# EAGLE board 14074-LuMini_2Inch-panel (EAGLE 9.0.1), part 1 of 3
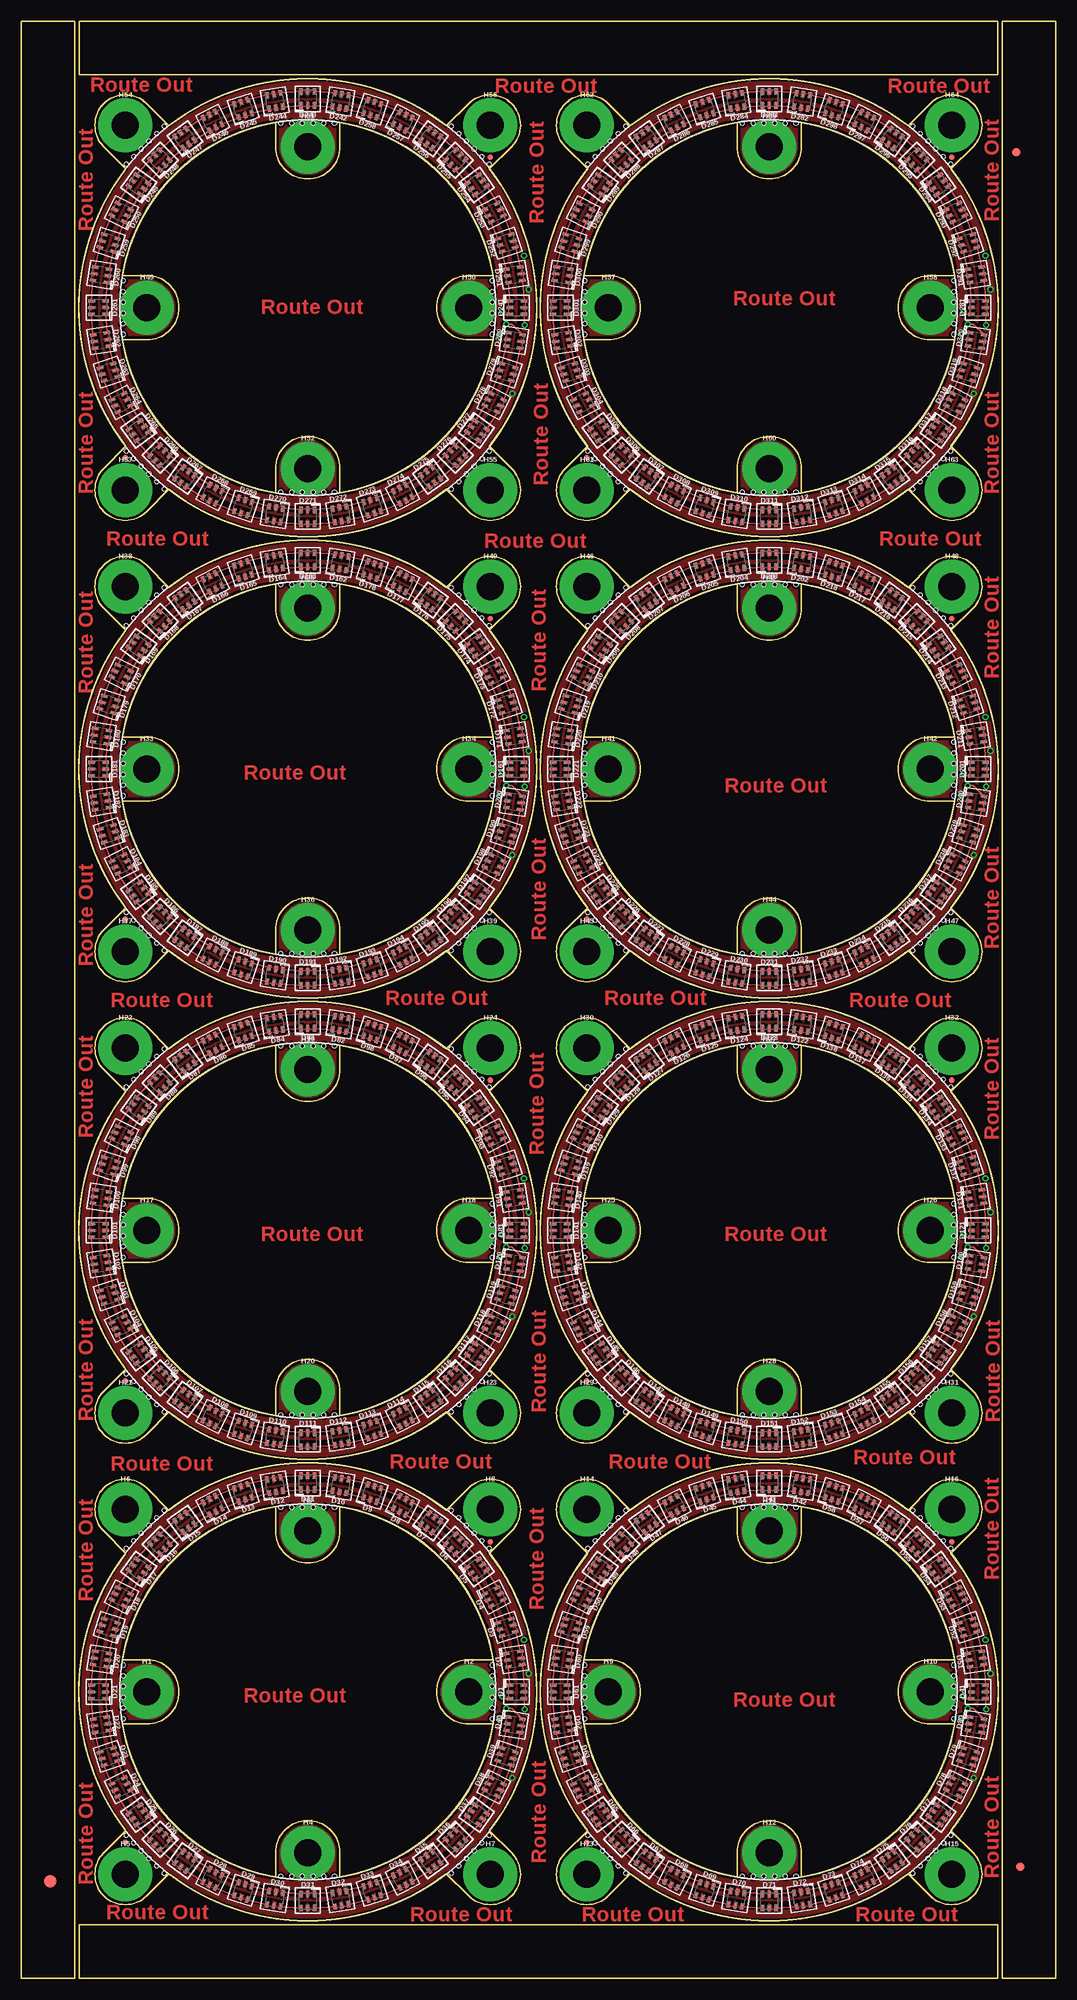
[diagram p0: board, top side]
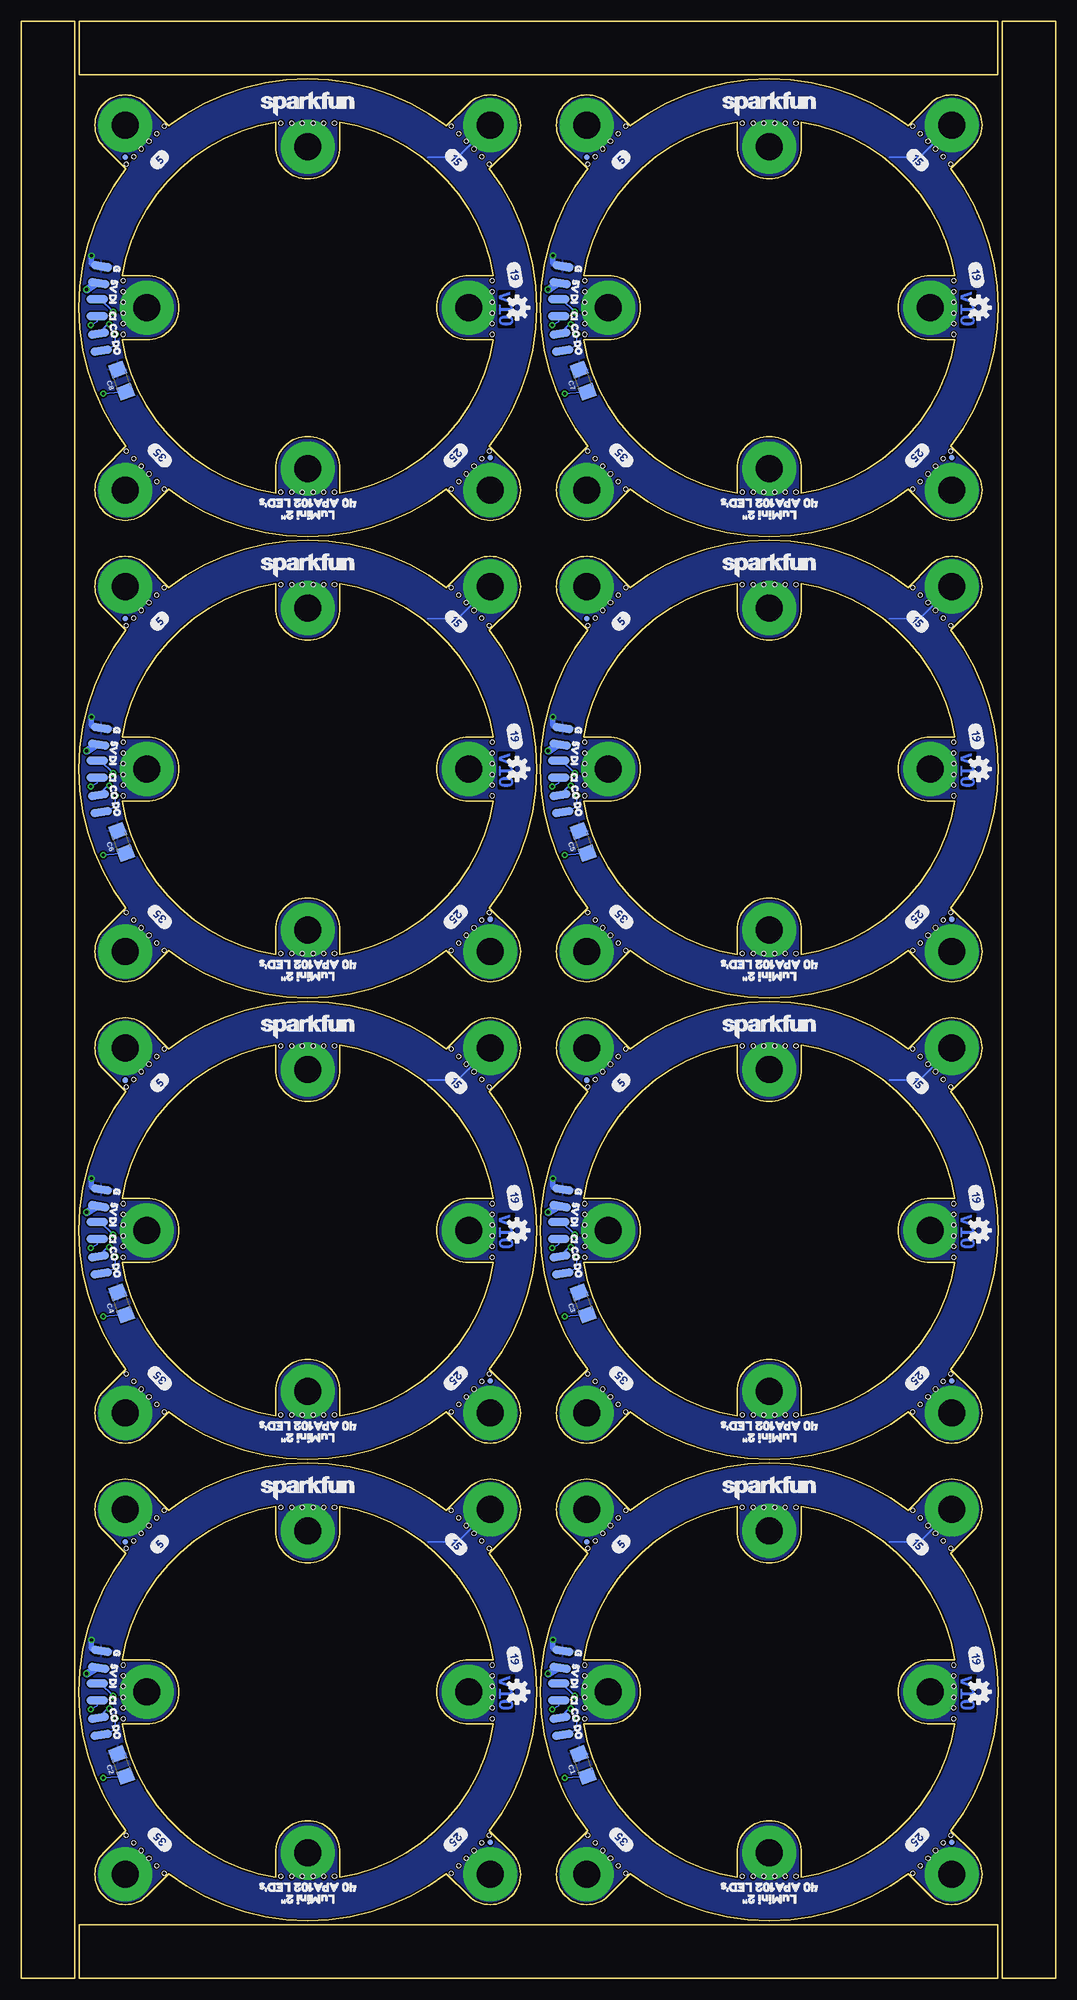
[diagram p1: board, bottom side, seen from below]

Size 122.43 x 231.65 mm. Coordinates in mm from the lower left corner, seen from the top.
Outline: 310 segments
Copper layers (1*16): Top 0.035mm / dielectric 1.5mm / Bottom 0.035mm
Design rules "SparkFun-2-layer-TIGHT": minimum track width 7mil, minimum drill 15mil, track to track 7mil, track to pad 7mil, pad to pad 7mil, via to via 7mil, smd to smd 7mil, copper to edge 7mil, drill to drill 7mil, minimum pad ring 7mil, minimum via ring 7mil, stop-mask expansion 4mil, vias tented up to drill 25mil, thermal gap 10mil
Holes 0.51 mm at 55.75,33.27 55.75,32 55.75,30.73 55.75,34.54 55.75,35.81 55.75,37.08 34.54,55.75 35.81,55.75 37.08,55.75 33.27,55.75 32,55.75 30.73,55.75 12.07,34.54 12.07,35.81 12.07,37.08 12.07,33.27 12.07,32 12.07,30.73 33.27,12.07 32,12.07 30.73,12.07 34.54,12.07 35.81,12.07 37.08,12.07 14.23,15.13 13.33,16.03 12.43,16.92 15.13,14.23 16.03,13.33 16.92,12.43 52.69,14.23 51.79,13.33 50.89,12.43 53.59,15.13 54.49,16.03 55.38,16.92 53.59,52.69 54.49,51.79 55.38,50.89 52.69,53.59 51.79,54.49 50.89,55.38 15.13,53.59 16.03,54.49 16.92,55.38 14.23,52.69 13.33,51.79 12.43,50.89 110.36,33.27 110.36,32 110.36,30.73 110.36,34.54 110.36,35.81 110.36,37.08 89.15,55.75 90.42,55.75 91.69,55.75 87.88,55.75 86.61,55.75 85.34,55.75 66.67,34.54 66.67,35.81 66.67,37.08 66.67,33.27 66.67,32 66.67,30.73 87.88,12.07 86.61,12.07 85.34,12.07 89.15,12.07 90.42,12.07 91.69,12.07 68.84,15.13 67.94,16.03 67.04,16.92 69.74,14.23 70.64,13.33 71.53,12.43 107.3,14.23 106.4,13.33 105.5,12.43 108.2,15.13 109.1,16.03 109.99,16.92 108.2,52.69 109.1,51.79 109.99,50.89 107.3,53.59 106.4,54.49 105.5,55.38 69.74,53.59 70.64,54.49 71.53,55.38 68.84,52.69 67.94,51.79 67.04,50.89 55.75,87.88 55.75,86.61 55.75,85.34 55.75,89.15 55.75,90.42 55.75,91.69 34.54,110.36 35.81,110.36 37.08,110.36 33.27,110.36 32,110.36 30.73,110.36 12.07,89.15 12.07,90.42 12.07,91.69 12.07,87.88 12.07,86.61 12.07,85.34 33.27,66.67 32,66.67 30.73,66.67 34.54,66.67 35.81,66.67 37.08,66.67 14.23,69.74 13.33,70.64 12.43,71.53 15.13,68.84 16.03,67.94 16.92,67.04 52.69,68.84 51.79,67.94 50.89,67.04 53.59,69.74 54.49,70.64 55.38,71.53 53.59,107.3 54.49,106.4 55.38,105.5 52.69,108.2 51.79,109.1 50.89,109.99 15.13,108.2 16.03,109.1 16.92,109.99 14.23,107.3 13.33,106.4 12.43,105.5 110.36,87.88 110.36,86.61 110.36,85.34 110.36,89.15 110.36,90.42 110.36,91.69 89.15,110.36 90.42,110.36 91.69,110.36 87.88,110.36 86.61,110.36 85.34,110.36 66.67,89.15 66.67,90.42 66.67,91.69 66.67,87.88 66.67,86.61 66.67,85.34 87.88,66.67 86.61,66.67 85.34,66.67 89.15,66.67 90.42,66.67 91.69,66.67 68.84,69.74 67.94,70.64 67.04,71.53 69.74,68.84 70.64,67.94 71.53,67.04 107.3,68.84 106.4,67.94 105.5,67.04 108.2,69.74 109.1,70.64 109.99,71.53 108.2,107.3 109.1,106.4 109.99,105.5 107.3,108.2 106.4,109.1 105.5,109.99 69.74,108.2 70.64,109.1 71.53,109.99 68.84,107.3 67.94,106.4 67.04,105.5 55.75,142.49 55.75,141.22 55.75,139.95 55.75,143.76 55.75,145.03 55.75,146.3 34.54,164.97 35.81,164.97 37.08,164.97 33.27,164.97 32,164.97 30.73,164.97 12.07,143.76 12.07,145.03 12.07,146.3 12.07,142.49 12.07,141.22 12.07,139.95 33.27,121.28 32,121.28 30.73,121.28 34.54,121.28 35.81,121.28 37.08,121.28 14.23,124.35 13.33,125.25 12.43,126.14 15.13,123.45 16.03,122.55 16.92,121.65 52.69,123.45 51.79,122.55 50.89,121.65 53.59,124.35 54.49,125.25 55.38,126.14 53.59,161.91 54.49,161.01 55.38,160.11 52.69,162.81 51.79,163.71 50.89,164.6 15.13,162.81 16.03,163.71 16.92,164.6 14.23,161.91 13.33,161.01 12.43,160.11 110.36,142.49 110.36,141.22 110.36,139.95 110.36,143.76 110.36,145.03 110.36,146.3 89.15,164.97 90.42,164.97 91.69,164.97 87.88,164.97 86.61,164.97 85.34,164.97 66.67,143.76 66.67,145.03 66.67,146.3 66.67,142.49 66.67,141.22 66.67,139.95 87.88,121.28 86.61,121.28 85.34,121.28 89.15,121.28 90.42,121.28 91.69,121.28 68.84,124.35 67.94,125.25 67.04,126.14 69.74,123.45 70.64,122.55 71.53,121.65 107.3,123.45 106.4,122.55 105.5,121.65 108.2,124.35 109.1,125.25 109.99,126.14 108.2,161.91 109.1,161.01 109.99,160.11 107.3,162.81 106.4,163.71 105.5,164.6 69.74,162.81 70.64,163.71 71.53,164.6 68.84,161.91 67.94,161.01 67.04,160.11 55.75,197.1 55.75,195.83 55.75,194.56 55.75,198.37 55.75,199.64 55.75,200.91 34.54,219.58 35.81,219.58 37.08,219.58 33.27,219.58 32,219.58 30.73,219.58 12.07,198.37 12.07,199.64 12.07,200.91 12.07,197.1 12.07,195.83 12.07,194.56 33.27,175.89 32,175.89 30.73,175.89 34.54,175.89 35.81,175.89 37.08,175.89 14.23,178.96 13.33,179.86 12.43,180.75 15.13,178.06 16.03,177.16 16.92,176.26 52.69,178.06 51.79,177.16 50.89,176.26 53.59,178.96 54.49,179.86 55.38,180.75 53.59,216.52 54.49,215.62 55.38,214.72 52.69,217.42 51.79,218.32 50.89,219.21 15.13,217.42 16.03,218.32 16.92,219.21 14.23,216.52 13.33,215.62 12.43,214.72 110.36,197.1 110.36,195.83 110.36,194.56 110.36,198.37 110.36,199.64 110.36,200.91 89.15,219.58 90.42,219.58 91.69,219.58 87.88,219.58 86.61,219.58 85.34,219.58 66.67,198.37 66.67,199.64 66.67,200.91 66.67,197.1 66.67,195.83 66.67,194.56 87.88,175.89 86.61,175.89 85.34,175.89 89.15,175.89 90.42,175.89 91.69,175.89 68.84,178.96 67.94,179.86 67.04,180.75 69.74,178.06 70.64,177.16 71.53,176.26 107.3,178.06 106.4,177.16 105.5,176.26 108.2,178.96 109.1,179.86 109.99,180.75 108.2,216.52 109.1,215.62 109.99,214.72 107.3,217.42 106.4,218.32 105.5,219.21 69.74,217.42 70.64,218.32 71.53,219.21 68.84,216.52 67.94,215.62 67.04,214.72

## Footprints (pad centres in the part's own frame; a part is rotated, then mirrored left to right if it is on the bottom)
1206 = smd 1.6 x 1.8: 1 -1.4,0; 2 1.4,0
APA102-2020 = smd 0.4 x 0.7: CKI -0.8,-0.85; CKO 0.8,-0.85; GND 0,0.85; SDI -0.8,0.85; SDO 0.8,0.85; VDD 0,-0.85
FIDUCIAL-1.5X3 = smd 1.5 x 1.5: 1 0,0
FIDUCIAL-1X2 = smd 1 x 1: 1 0,0
FIDUCIAL-MICRO = smd 0.635 x 0.635: 1 0,0
STANDOFF-ELECTRICAL-NOTHERMALS = drill 3.2 pad 6.35: P1 0,0
SOLDER_PAD_2 = smd 1.016 x 2.54: P$1 -1.016,0; P$2 1.016,0

## Placement (x,y rotation side)
C1  DNP  [1206]  55.93,25.26 110 bottom
C2  DNP  [1206]  110.54,25.26 110 bottom
C3  DNP  [1206]  55.93,79.87 110 bottom
C4  DNP  [1206]  110.54,79.87 110 bottom
C5  DNP  [1206]  55.93,134.48 110 bottom
C6  DNP  [1206]  110.54,134.48 110 bottom
C7  DNP  [1206]  55.93,189.09 110 bottom
C8  DNP  [1206]  110.54,189.09 110 bottom
D1  APA102-2020  [APA102-2020]  58.67,33.91 90 top
D2  APA102-2020  [APA102-2020]  58.37,37.8 99 top
D3  APA102-2020  [APA102-2020]  57.45,41.55 108 top
D4  APA102-2020  [APA102-2020]  55.98,45.16 117 top
D5  APA102-2020  [APA102-2020]  53.95,48.46 126 top
D6  APA102-2020  [APA102-2020]  51.41,51.41 135 top
D7  APA102-2020  [APA102-2020]  48.46,53.95 144 top
D8  APA102-2020  [APA102-2020]  45.16,55.98 153 top
D9  APA102-2020  [APA102-2020]  41.55,57.45 162 top
D10  APA102-2020  [APA102-2020]  37.8,58.37 171 top
D11  APA102-2020  [APA102-2020]  33.91,58.67 180 top
D12  APA102-2020  [APA102-2020]  30.02,58.37 189 top
D13  APA102-2020  [APA102-2020]  26.26,57.45 198 top
D14  APA102-2020  [APA102-2020]  22.66,55.98 207 top
D15  APA102-2020  [APA102-2020]  19.35,53.95 216 top
D16  APA102-2020  [APA102-2020]  16.41,51.41 225 top
D17  APA102-2020  [APA102-2020]  13.87,48.46 234 top
D18  APA102-2020  [APA102-2020]  11.84,45.16 243 top
D19  APA102-2020  [APA102-2020]  10.36,41.55 252 top
D20  APA102-2020  [APA102-2020]  9.45,37.8 261 top
D21  APA102-2020  [APA102-2020]  9.14,33.91 270 top
D22  APA102-2020  [APA102-2020]  9.45,30.02 279 top
D23  APA102-2020  [APA102-2020]  10.36,26.26 288 top
D24  APA102-2020  [APA102-2020]  11.84,22.66 297 top
D25  APA102-2020  [APA102-2020]  13.87,19.35 306 top
D26  APA102-2020  [APA102-2020]  16.41,16.41 315 top
D27  APA102-2020  [APA102-2020]  19.35,13.87 324 top
D28  APA102-2020  [APA102-2020]  22.66,11.84 333 top
D29  APA102-2020  [APA102-2020]  26.26,10.36 342 top
D30  APA102-2020  [APA102-2020]  30.02,9.45 351 top
D31  APA102-2020  [APA102-2020]  33.91,9.14 0 top
D32  APA102-2020  [APA102-2020]  37.8,9.45 9 top
D33  APA102-2020  [APA102-2020]  41.55,10.36 18 top
D34  APA102-2020  [APA102-2020]  45.16,11.84 27 top
D35  APA102-2020  [APA102-2020]  48.46,13.87 36 top
D36  APA102-2020  [APA102-2020]  51.41,16.41 45 top
D37  APA102-2020  [APA102-2020]  53.95,19.35 54 top
D38  APA102-2020  [APA102-2020]  55.98,22.66 63 top
D39  APA102-2020  [APA102-2020]  57.45,26.26 72 top
D40  APA102-2020  [APA102-2020]  58.37,30.02 81 top
D41  APA102-2020  [APA102-2020]  113.28,33.91 90 top
D42  APA102-2020  [APA102-2020]  92.41,58.37 171 top
D43  APA102-2020  [APA102-2020]  88.52,58.67 180 top
D44  APA102-2020  [APA102-2020]  84.63,58.37 189 top
D45  APA102-2020  [APA102-2020]  80.87,57.45 198 top
D46  APA102-2020  [APA102-2020]  77.27,55.98 207 top
D47  APA102-2020  [APA102-2020]  73.96,53.95 216 top
D48  APA102-2020  [APA102-2020]  71.02,51.41 225 top
D49  APA102-2020  [APA102-2020]  68.48,48.46 234 top
D50  APA102-2020  [APA102-2020]  66.45,45.16 243 top
D51  APA102-2020  [APA102-2020]  112.98,37.8 99 top
D52  APA102-2020  [APA102-2020]  112.06,41.55 108 top
D53  APA102-2020  [APA102-2020]  110.59,45.16 117 top
D54  APA102-2020  [APA102-2020]  108.56,48.46 126 top
D55  APA102-2020  [APA102-2020]  106.02,51.41 135 top
D56  APA102-2020  [APA102-2020]  103.07,53.95 144 top
D57  APA102-2020  [APA102-2020]  99.77,55.98 153 top
D58  APA102-2020  [APA102-2020]  96.16,57.45 162 top
D59  APA102-2020  [APA102-2020]  64.97,41.55 252 top
D60  APA102-2020  [APA102-2020]  64.06,37.8 261 top
D61  APA102-2020  [APA102-2020]  63.75,33.91 270 top
D62  APA102-2020  [APA102-2020]  64.06,30.02 279 top
D63  APA102-2020  [APA102-2020]  64.97,26.26 288 top
D64  APA102-2020  [APA102-2020]  66.45,22.66 297 top
D65  APA102-2020  [APA102-2020]  68.48,19.35 306 top
D66  APA102-2020  [APA102-2020]  71.02,16.41 315 top
D67  APA102-2020  [APA102-2020]  73.96,13.87 324 top
D68  APA102-2020  [APA102-2020]  77.27,11.84 333 top
D69  APA102-2020  [APA102-2020]  80.87,10.36 342 top
D70  APA102-2020  [APA102-2020]  84.63,9.45 351 top
D71  APA102-2020  [APA102-2020]  88.52,9.14 0 top
D72  APA102-2020  [APA102-2020]  92.41,9.45 9 top
D73  APA102-2020  [APA102-2020]  96.16,10.36 18 top
D74  APA102-2020  [APA102-2020]  99.77,11.84 27 top
D75  APA102-2020  [APA102-2020]  103.07,13.87 36 top
D76  APA102-2020  [APA102-2020]  106.02,16.41 45 top
D77  APA102-2020  [APA102-2020]  108.56,19.35 54 top
D78  APA102-2020  [APA102-2020]  110.59,22.66 63 top
D79  APA102-2020  [APA102-2020]  112.06,26.26 72 top
D80  APA102-2020  [APA102-2020]  112.98,30.02 81 top
D81  APA102-2020  [APA102-2020]  58.67,88.52 90 top
D82  APA102-2020  [APA102-2020]  37.8,112.98 171 top
D83  APA102-2020  [APA102-2020]  33.91,113.28 180 top
D84  APA102-2020  [APA102-2020]  30.02,112.98 189 top
D85  APA102-2020  [APA102-2020]  26.26,112.06 198 top
D86  APA102-2020  [APA102-2020]  22.66,110.59 207 top
D87  APA102-2020  [APA102-2020]  19.35,108.56 216 top
D88  APA102-2020  [APA102-2020]  16.41,106.02 225 top
D89  APA102-2020  [APA102-2020]  13.87,103.07 234 top
D90  APA102-2020  [APA102-2020]  11.84,99.77 243 top
D91  APA102-2020  [APA102-2020]  58.37,92.41 99 top
D92  APA102-2020  [APA102-2020]  57.45,96.16 108 top
D93  APA102-2020  [APA102-2020]  55.98,99.77 117 top
D94  APA102-2020  [APA102-2020]  53.95,103.07 126 top
D95  APA102-2020  [APA102-2020]  51.41,106.02 135 top
D96  APA102-2020  [APA102-2020]  48.46,108.56 144 top
D97  APA102-2020  [APA102-2020]  45.16,110.59 153 top
D98  APA102-2020  [APA102-2020]  41.55,112.06 162 top
D99  APA102-2020  [APA102-2020]  10.36,96.16 252 top
D100  APA102-2020  [APA102-2020]  9.45,92.41 261 top
D101  APA102-2020  [APA102-2020]  9.14,88.52 270 top
D102  APA102-2020  [APA102-2020]  9.45,84.63 279 top
D103  APA102-2020  [APA102-2020]  10.36,80.87 288 top
D104  APA102-2020  [APA102-2020]  11.84,77.27 297 top
D105  APA102-2020  [APA102-2020]  13.87,73.96 306 top
D106  APA102-2020  [APA102-2020]  16.41,71.02 315 top
D107  APA102-2020  [APA102-2020]  19.35,68.48 324 top
D108  APA102-2020  [APA102-2020]  22.66,66.45 333 top
D109  APA102-2020  [APA102-2020]  26.26,64.97 342 top
D110  APA102-2020  [APA102-2020]  30.02,64.06 351 top
D111  APA102-2020  [APA102-2020]  33.91,63.75 0 top
D112  APA102-2020  [APA102-2020]  37.8,64.06 9 top
D113  APA102-2020  [APA102-2020]  41.55,64.97 18 top
D114  APA102-2020  [APA102-2020]  45.16,66.45 27 top
D115  APA102-2020  [APA102-2020]  48.46,68.48 36 top
D116  APA102-2020  [APA102-2020]  51.41,71.02 45 top
D117  APA102-2020  [APA102-2020]  53.95,73.96 54 top
D118  APA102-2020  [APA102-2020]  55.98,77.27 63 top
D119  APA102-2020  [APA102-2020]  57.45,80.87 72 top
D120  APA102-2020  [APA102-2020]  58.37,84.63 81 top
D121  APA102-2020  [APA102-2020]  113.28,88.52 90 top
D122  APA102-2020  [APA102-2020]  92.41,112.98 171 top
D123  APA102-2020  [APA102-2020]  88.52,113.28 180 top
D124  APA102-2020  [APA102-2020]  84.63,112.98 189 top
D125  APA102-2020  [APA102-2020]  80.87,112.06 198 top
D126  APA102-2020  [APA102-2020]  77.27,110.59 207 top
D127  APA102-2020  [APA102-2020]  73.96,108.56 216 top
D128  APA102-2020  [APA102-2020]  71.02,106.02 225 top
D129  APA102-2020  [APA102-2020]  68.48,103.07 234 top
D130  APA102-2020  [APA102-2020]  66.45,99.77 243 top
D131  APA102-2020  [APA102-2020]  112.98,92.41 99 top
D132  APA102-2020  [APA102-2020]  112.06,96.16 108 top
D133  APA102-2020  [APA102-2020]  110.59,99.77 117 top
D134  APA102-2020  [APA102-2020]  108.56,103.07 126 top
D135  APA102-2020  [APA102-2020]  106.02,106.02 135 top
D136  APA102-2020  [APA102-2020]  103.07,108.56 144 top
D137  APA102-2020  [APA102-2020]  99.77,110.59 153 top
D138  APA102-2020  [APA102-2020]  96.16,112.06 162 top
D139  APA102-2020  [APA102-2020]  64.97,96.16 252 top
D140  APA102-2020  [APA102-2020]  64.06,92.41 261 top
D141  APA102-2020  [APA102-2020]  63.75,88.52 270 top
D142  APA102-2020  [APA102-2020]  64.06,84.63 279 top
D143  APA102-2020  [APA102-2020]  64.97,80.87 288 top
D144  APA102-2020  [APA102-2020]  66.45,77.27 297 top
D145  APA102-2020  [APA102-2020]  68.48,73.96 306 top
D146  APA102-2020  [APA102-2020]  71.02,71.02 315 top
D147  APA102-2020  [APA102-2020]  73.96,68.48 324 top
D148  APA102-2020  [APA102-2020]  77.27,66.45 333 top
D149  APA102-2020  [APA102-2020]  80.87,64.97 342 top
D150  APA102-2020  [APA102-2020]  84.63,64.06 351 top
D151  APA102-2020  [APA102-2020]  88.52,63.75 0 top
D152  APA102-2020  [APA102-2020]  92.41,64.06 9 top
D153  APA102-2020  [APA102-2020]  96.16,64.97 18 top
D154  APA102-2020  [APA102-2020]  99.77,66.45 27 top
D155  APA102-2020  [APA102-2020]  103.07,68.48 36 top
D156  APA102-2020  [APA102-2020]  106.02,71.02 45 top
D157  APA102-2020  [APA102-2020]  108.56,73.96 54 top
D158  APA102-2020  [APA102-2020]  110.59,77.27 63 top
D159  APA102-2020  [APA102-2020]  112.06,80.87 72 top
D160  APA102-2020  [APA102-2020]  112.98,84.63 81 top
D161  APA102-2020  [APA102-2020]  58.67,143.13 90 top
D162  APA102-2020  [APA102-2020]  37.8,167.59 171 top
D163  APA102-2020  [APA102-2020]  33.91,167.89 180 top
D164  APA102-2020  [APA102-2020]  30.02,167.59 189 top
D165  APA102-2020  [APA102-2020]  26.26,166.67 198 top
D166  APA102-2020  [APA102-2020]  22.66,165.2 207 top
D167  APA102-2020  [APA102-2020]  19.35,163.17 216 top
D168  APA102-2020  [APA102-2020]  16.41,160.63 225 top
D169  APA102-2020  [APA102-2020]  13.87,157.68 234 top
D170  APA102-2020  [APA102-2020]  11.84,154.38 243 top
D171  APA102-2020  [APA102-2020]  58.37,147.02 99 top
D172  APA102-2020  [APA102-2020]  57.45,150.77 108 top
D173  APA102-2020  [APA102-2020]  55.98,154.38 117 top
D174  APA102-2020  [APA102-2020]  53.95,157.68 126 top
D175  APA102-2020  [APA102-2020]  51.41,160.63 135 top
D176  APA102-2020  [APA102-2020]  48.46,163.17 144 top
D177  APA102-2020  [APA102-2020]  45.16,165.2 153 top
D178  APA102-2020  [APA102-2020]  41.55,166.67 162 top
D179  APA102-2020  [APA102-2020]  10.36,150.77 252 top
D180  APA102-2020  [APA102-2020]  9.45,147.02 261 top
D181  APA102-2020  [APA102-2020]  9.14,143.13 270 top
D182  APA102-2020  [APA102-2020]  9.45,139.24 279 top
D183  APA102-2020  [APA102-2020]  10.36,135.48 288 top
D184  APA102-2020  [APA102-2020]  11.84,131.88 297 top
D185  APA102-2020  [APA102-2020]  13.87,128.57 306 top
D186  APA102-2020  [APA102-2020]  16.41,125.63 315 top
D187  APA102-2020  [APA102-2020]  19.35,123.09 324 top
D188  APA102-2020  [APA102-2020]  22.66,121.06 333 top
D189  APA102-2020  [APA102-2020]  26.26,119.58 342 top
D190  APA102-2020  [APA102-2020]  30.02,118.67 351 top
D191  APA102-2020  [APA102-2020]  33.91,118.36 0 top
D192  APA102-2020  [APA102-2020]  37.8,118.67 9 top
D193  APA102-2020  [APA102-2020]  41.55,119.58 18 top
D194  APA102-2020  [APA102-2020]  45.16,121.06 27 top
D195  APA102-2020  [APA102-2020]  48.46,123.09 36 top
D196  APA102-2020  [APA102-2020]  51.41,125.63 45 top
D197  APA102-2020  [APA102-2020]  53.95,128.57 54 top
D198  APA102-2020  [APA102-2020]  55.98,131.88 63 top
D199  APA102-2020  [APA102-2020]  57.45,135.48 72 top
D200  APA102-2020  [APA102-2020]  58.37,139.24 81 top
D201  APA102-2020  [APA102-2020]  113.28,143.13 90 top
D202  APA102-2020  [APA102-2020]  92.41,167.59 171 top
D203  APA102-2020  [APA102-2020]  88.52,167.89 180 top
D204  APA102-2020  [APA102-2020]  84.63,167.59 189 top
D205  APA102-2020  [APA102-2020]  80.87,166.67 198 top
D206  APA102-2020  [APA102-2020]  77.27,165.2 207 top
D207  APA102-2020  [APA102-2020]  73.96,163.17 216 top
D208  APA102-2020  [APA102-2020]  71.02,160.63 225 top
D209  APA102-2020  [APA102-2020]  68.48,157.68 234 top
D210  APA102-2020  [APA102-2020]  66.45,154.38 243 top
D211  APA102-2020  [APA102-2020]  112.98,147.02 99 top
D212  APA102-2020  [APA102-2020]  112.06,150.77 108 top
D213  APA102-2020  [APA102-2020]  110.59,154.38 117 top
D214  APA102-2020  [APA102-2020]  108.56,157.68 126 top
D215  APA102-2020  [APA102-2020]  106.02,160.63 135 top
D216  APA102-2020  [APA102-2020]  103.07,163.17 144 top
D217  APA102-2020  [APA102-2020]  99.77,165.2 153 top
D218  APA102-2020  [APA102-2020]  96.16,166.67 162 top
D219  APA102-2020  [APA102-2020]  64.97,150.77 252 top
D220  APA102-2020  [APA102-2020]  64.06,147.02 261 top
D221  APA102-2020  [APA102-2020]  63.75,143.13 270 top
D222  APA102-2020  [APA102-2020]  64.06,139.24 279 top
D223  APA102-2020  [APA102-2020]  64.97,135.48 288 top
D224  APA102-2020  [APA102-2020]  66.45,131.88 297 top
D225  APA102-2020  [APA102-2020]  68.48,128.57 306 top
D226  APA102-2020  [APA102-2020]  71.02,125.63 315 top
D227  APA102-2020  [APA102-2020]  73.96,123.09 324 top
D228  APA102-2020  [APA102-2020]  77.27,121.06 333 top
D229  APA102-2020  [APA102-2020]  80.87,119.58 342 top
D230  APA102-2020  [APA102-2020]  84.63,118.67 351 top
D231  APA102-2020  [APA102-2020]  88.52,118.36 0 top
D232  APA102-2020  [APA102-2020]  92.41,118.67 9 top
D233  APA102-2020  [APA102-2020]  96.16,119.58 18 top
D234  APA102-2020  [APA102-2020]  99.77,121.06 27 top
D235  APA102-2020  [APA102-2020]  103.07,123.09 36 top
D236  APA102-2020  [APA102-2020]  106.02,125.63 45 top
D237  APA102-2020  [APA102-2020]  108.56,128.57 54 top
D238  APA102-2020  [APA102-2020]  110.59,131.88 63 top
D239  APA102-2020  [APA102-2020]  112.06,135.48 72 top
D240  APA102-2020  [APA102-2020]  112.98,139.24 81 top
D241  APA102-2020  [APA102-2020]  58.67,197.74 90 top
D242  APA102-2020  [APA102-2020]  37.8,222.2 171 top
D243  APA102-2020  [APA102-2020]  33.91,222.5 180 top
D244  APA102-2020  [APA102-2020]  30.02,222.2 189 top
D245  APA102-2020  [APA102-2020]  26.26,221.28 198 top
D246  APA102-2020  [APA102-2020]  22.66,219.81 207 top
D247  APA102-2020  [APA102-2020]  19.35,217.78 216 top
D248  APA102-2020  [APA102-2020]  16.41,215.24 225 top
D249  APA102-2020  [APA102-2020]  13.87,212.29 234 top
D250  APA102-2020  [APA102-2020]  11.84,208.99 243 top
D251  APA102-2020  [APA102-2020]  58.37,201.63 99 top
D252  APA102-2020  [APA102-2020]  57.45,205.38 108 top
D253  APA102-2020  [APA102-2020]  55.98,208.99 117 top
D254  APA102-2020  [APA102-2020]  53.95,212.29 126 top
D255  APA102-2020  [APA102-2020]  51.41,215.24 135 top
D256  APA102-2020  [APA102-2020]  48.46,217.78 144 top
D257  APA102-2020  [APA102-2020]  45.16,219.81 153 top
D258  APA102-2020  [APA102-2020]  41.55,221.28 162 top
D259  APA102-2020  [APA102-2020]  10.36,205.38 252 top
D260  APA102-2020  [APA102-2020]  9.45,201.63 261 top
D261  APA102-2020  [APA102-2020]  9.14,197.74 270 top
D262  APA102-2020  [APA102-2020]  9.45,193.85 279 top
D263  APA102-2020  [APA102-2020]  10.36,190.09 288 top
D264  APA102-2020  [APA102-2020]  11.84,186.49 297 top
D265  APA102-2020  [APA102-2020]  13.87,183.18 306 top
D266  APA102-2020  [APA102-2020]  16.41,180.24 315 top
D267  APA102-2020  [APA102-2020]  19.35,177.7 324 top
D268  APA102-2020  [APA102-2020]  22.66,175.67 333 top
D269  APA102-2020  [APA102-2020]  26.26,174.19 342 top
D270  APA102-2020  [APA102-2020]  30.02,173.28 351 top
D271  APA102-2020  [APA102-2020]  33.91,172.97 0 top
D272  APA102-2020  [APA102-2020]  37.8,173.28 9 top
D273  APA102-2020  [APA102-2020]  41.55,174.19 18 top
D274  APA102-2020  [APA102-2020]  45.16,175.67 27 top
D275  APA102-2020  [APA102-2020]  48.46,177.7 36 top
D276  APA102-2020  [APA102-2020]  51.41,180.24 45 top
D277  APA102-2020  [APA102-2020]  53.95,183.18 54 top
D278  APA102-2020  [APA102-2020]  55.98,186.49 63 top
D279  APA102-2020  [APA102-2020]  57.45,190.09 72 top
D280  APA102-2020  [APA102-2020]  58.37,193.85 81 top
D281  APA102-2020  [APA102-2020]  113.28,197.74 90 top
D282  APA102-2020  [APA102-2020]  92.41,222.2 171 top
D283  APA102-2020  [APA102-2020]  88.52,222.5 180 top
D284  APA102-2020  [APA102-2020]  84.63,222.2 189 top
D285  APA102-2020  [APA102-2020]  80.87,221.28 198 top
D286  APA102-2020  [APA102-2020]  77.27,219.81 207 top
D287  APA102-2020  [APA102-2020]  73.96,217.78 216 top
D288  APA102-2020  [APA102-2020]  71.02,215.24 225 top
D289  APA102-2020  [APA102-2020]  68.48,212.29 234 top
D290  APA102-2020  [APA102-2020]  66.45,208.99 243 top
D291  APA102-2020  [APA102-2020]  112.98,201.63 99 top
D292  APA102-2020  [APA102-2020]  112.06,205.38 108 top
D293  APA102-2020  [APA102-2020]  110.59,208.99 117 top
D294  APA102-2020  [APA102-2020]  108.56,212.29 126 top
D295  APA102-2020  [APA102-2020]  106.02,215.24 135 top
D296  APA102-2020  [APA102-2020]  103.07,217.78 144 top
D297  APA102-2020  [APA102-2020]  99.77,219.81 153 top
D298  APA102-2020  [APA102-2020]  96.16,221.28 162 top
D299  APA102-2020  [APA102-2020]  64.97,205.38 252 top
D300  APA102-2020  [APA102-2020]  64.06,201.63 261 top
D301  APA102-2020  [APA102-2020]  63.75,197.74 270 top
D302  APA102-2020  [APA102-2020]  64.06,193.85 279 top
D303  APA102-2020  [APA102-2020]  64.97,190.09 288 top
D304  APA102-2020  [APA102-2020]  66.45,186.49 297 top
D305  APA102-2020  [APA102-2020]  68.48,183.18 306 top
D306  APA102-2020  [APA102-2020]  71.02,180.24 315 top
D307  APA102-2020  [APA102-2020]  73.96,177.7 324 top
D308  APA102-2020  [APA102-2020]  77.27,175.67 333 top
D309  APA102-2020  [APA102-2020]  80.87,174.19 342 top
D310  APA102-2020  [APA102-2020]  84.63,173.28 351 top
D311  APA102-2020  [APA102-2020]  88.52,172.97 0 top
D312  APA102-2020  [APA102-2020]  92.41,173.28 9 top
D313  APA102-2020  [APA102-2020]  96.16,174.19 18 top
D314  APA102-2020  [APA102-2020]  99.77,175.67 27 top
D315  APA102-2020  [APA102-2020]  103.07,177.7 36 top
D316  APA102-2020  [APA102-2020]  106.02,180.24 45 top
D317  APA102-2020  [APA102-2020]  108.56,183.18 54 top
D318  APA102-2020  [APA102-2020]  110.59,186.49 63 top
D319  APA102-2020  [APA102-2020]  112.06,190.09 72 top
D320  APA102-2020  [APA102-2020]  112.98,193.85 81 top
E$1  [FIDUCIAL-1.5X3]  3.43,11.49 0 top
E$5  [FIDUCIAL-1X2]  117.73,216.15 180 top
E$6  [FIDUCIAL-1X2]  118.24,13.21 0 top
FD1  FIDUCIALUFIDUCIAL  [FIDUCIAL-MICRO]  12.32,16.13 0 top
FD2  FIDUCIALUFIDUCIAL  [FIDUCIAL-MICRO]  12.32,16.13 0 bottom
FD3  FIDUCIALUFIDUCIAL  [FIDUCIAL-MICRO]  55.5,51.69 0 top
FD4  FIDUCIALUFIDUCIAL  [FIDUCIAL-MICRO]  55.5,51.69 0 bottom
FD5  FIDUCIALUFIDUCIAL  [FIDUCIAL-MICRO]  66.93,16.13 0 top
FD6  FIDUCIALUFIDUCIAL  [FIDUCIAL-MICRO]  66.93,16.13 0 bottom
FD7  FIDUCIALUFIDUCIAL  [FIDUCIAL-MICRO]  110.11,51.69 0 top
FD8  FIDUCIALUFIDUCIAL  [FIDUCIAL-MICRO]  110.11,51.69 0 bottom
FD9  FIDUCIALUFIDUCIAL  [FIDUCIAL-MICRO]  12.32,70.74 0 top
FD10  FIDUCIALUFIDUCIAL  [FIDUCIAL-MICRO]  12.32,70.74 0 bottom
FD11  FIDUCIALUFIDUCIAL  [FIDUCIAL-MICRO]  55.5,106.3 0 top
FD12  FIDUCIALUFIDUCIAL  [FIDUCIAL-MICRO]  55.5,106.3 0 bottom
FD13  FIDUCIALUFIDUCIAL  [FIDUCIAL-MICRO]  66.93,70.74 0 top
FD14  FIDUCIALUFIDUCIAL  [FIDUCIAL-MICRO]  66.93,70.74 0 bottom
FD15  FIDUCIALUFIDUCIAL  [FIDUCIAL-MICRO]  110.11,106.3 0 top
FD16  FIDUCIALUFIDUCIAL  [FIDUCIAL-MICRO]  110.11,106.3 0 bottom
FD17  FIDUCIALUFIDUCIAL  [FIDUCIAL-MICRO]  12.32,125.35 0 top
FD18  FIDUCIALUFIDUCIAL  [FIDUCIAL-MICRO]  12.32,125.35 0 bottom
FD19  FIDUCIALUFIDUCIAL  [FIDUCIAL-MICRO]  55.5,160.91 0 top
FD20  FIDUCIALUFIDUCIAL  [FIDUCIAL-MICRO]  55.5,160.91 0 bottom
FD21  FIDUCIALUFIDUCIAL  [FIDUCIAL-MICRO]  66.93,125.35 0 top
FD22  FIDUCIALUFIDUCIAL  [FIDUCIAL-MICRO]  66.93,125.35 0 bottom
FD23  FIDUCIALUFIDUCIAL  [FIDUCIAL-MICRO]  110.11,160.91 0 top
FD24  FIDUCIALUFIDUCIAL  [FIDUCIAL-MICRO]  110.11,160.91 0 bottom
FD25  FIDUCIALUFIDUCIAL  [FIDUCIAL-MICRO]  12.32,179.96 0 top
FD26  FIDUCIALUFIDUCIAL  [FIDUCIAL-MICRO]  12.32,179.96 0 bottom
FD27  FIDUCIALUFIDUCIAL  [FIDUCIAL-MICRO]  55.5,215.52 0 top
FD28  FIDUCIALUFIDUCIAL  [FIDUCIAL-MICRO]  55.5,215.52 0 bottom
FD29  FIDUCIALUFIDUCIAL  [FIDUCIAL-MICRO]  66.93,179.96 0 top
FD30  FIDUCIALUFIDUCIAL  [FIDUCIAL-MICRO]  66.93,179.96 0 bottom
FD31  FIDUCIALUFIDUCIAL  [FIDUCIAL-MICRO]  110.11,215.52 0 top
FD32  FIDUCIALUFIDUCIAL  [FIDUCIAL-MICRO]  110.11,215.52 0 bottom
H1  STANDOFF_ELECTRICAL-NOTHERMALS  [STANDOFF-ELECTRICAL-NOTHERMALS]  14.86,33.91 0 top
H2  STANDOFF_ELECTRICAL-NOTHERMALS  [STANDOFF-ELECTRICAL-NOTHERMALS]  52.96,33.91 0 top
H3  STANDOFF_ELECTRICAL-NOTHERMALS  [STANDOFF-ELECTRICAL-NOTHERMALS]  33.91,52.96 0 top
H4  STANDOFF_ELECTRICAL-NOTHERMALS  [STANDOFF-ELECTRICAL-NOTHERMALS]  33.91,14.86 0 top
H5  STANDOFF_ELECTRICAL-NOTHERMALS  [STANDOFF-ELECTRICAL-NOTHERMALS]  12.32,12.32 0 top
H6  STANDOFF_ELECTRICAL-NOTHERMALS  [STANDOFF-ELECTRICAL-NOTHERMALS]  12.32,55.5 0 top
H7  STANDOFF_ELECTRICAL-NOTHERMALS  [STANDOFF-ELECTRICAL-NOTHERMALS]  55.5,12.32 0 top
H8  STANDOFF_ELECTRICAL-NOTHERMALS  [STANDOFF-ELECTRICAL-NOTHERMALS]  55.5,55.5 0 top
H9  STANDOFF_ELECTRICAL-NOTHERMALS  [STANDOFF-ELECTRICAL-NOTHERMALS]  69.47,33.91 0 top
H10  STANDOFF_ELECTRICAL-NOTHERMALS  [STANDOFF-ELECTRICAL-NOTHERMALS]  107.57,33.91 0 top
H11  STANDOFF_ELECTRICAL-NOTHERMALS  [STANDOFF-ELECTRICAL-NOTHERMALS]  88.52,52.96 0 top
H12  STANDOFF_ELECTRICAL-NOTHERMALS  [STANDOFF-ELECTRICAL-NOTHERMALS]  88.52,14.86 0 top
H13  STANDOFF_ELECTRICAL-NOTHERMALS  [STANDOFF-ELECTRICAL-NOTHERMALS]  66.93,12.32 0 top
H14  STANDOFF_ELECTRICAL-NOTHERMALS  [STANDOFF-ELECTRICAL-NOTHERMALS]  66.93,55.5 0 top
H15  STANDOFF_ELECTRICAL-NOTHERMALS  [STANDOFF-ELECTRICAL-NOTHERMALS]  110.11,12.32 0 top
H16  STANDOFF_ELECTRICAL-NOTHERMALS  [STANDOFF-ELECTRICAL-NOTHERMALS]  110.11,55.5 0 top
H17  STANDOFF_ELECTRICAL-NOTHERMALS  [STANDOFF-ELECTRICAL-NOTHERMALS]  14.86,88.52 0 top
H18  STANDOFF_ELECTRICAL-NOTHERMALS  [STANDOFF-ELECTRICAL-NOTHERMALS]  52.96,88.52 0 top
H19  STANDOFF_ELECTRICAL-NOTHERMALS  [STANDOFF-ELECTRICAL-NOTHERMALS]  33.91,107.57 0 top
H20  STANDOFF_ELECTRICAL-NOTHERMALS  [STANDOFF-ELECTRICAL-NOTHERMALS]  33.91,69.47 0 top
H21  STANDOFF_ELECTRICAL-NOTHERMALS  [STANDOFF-ELECTRICAL-NOTHERMALS]  12.32,66.93 0 top
H22  STANDOFF_ELECTRICAL-NOTHERMALS  [STANDOFF-ELECTRICAL-NOTHERMALS]  12.32,110.11 0 top
H23  STANDOFF_ELECTRICAL-NOTHERMALS  [STANDOFF-ELECTRICAL-NOTHERMALS]  55.5,66.93 0 top
H24  STANDOFF_ELECTRICAL-NOTHERMALS  [STANDOFF-ELECTRICAL-NOTHERMALS]  55.5,110.11 0 top
H25  STANDOFF_ELECTRICAL-NOTHERMALS  [STANDOFF-ELECTRICAL-NOTHERMALS]  69.47,88.52 0 top
H26  STANDOFF_ELECTRICAL-NOTHERMALS  [STANDOFF-ELECTRICAL-NOTHERMALS]  107.57,88.52 0 top
H27  STANDOFF_ELECTRICAL-NOTHERMALS  [STANDOFF-ELECTRICAL-NOTHERMALS]  88.52,107.57 0 top
H28  STANDOFF_ELECTRICAL-NOTHERMALS  [STANDOFF-ELECTRICAL-NOTHERMALS]  88.52,69.47 0 top
H29  STANDOFF_ELECTRICAL-NOTHERMALS  [STANDOFF-ELECTRICAL-NOTHERMALS]  66.93,66.93 0 top
H30  STANDOFF_ELECTRICAL-NOTHERMALS  [STANDOFF-ELECTRICAL-NOTHERMALS]  66.93,110.11 0 top
H31  STANDOFF_ELECTRICAL-NOTHERMALS  [STANDOFF-ELECTRICAL-NOTHERMALS]  110.11,66.93 0 top
H32  STANDOFF_ELECTRICAL-NOTHERMALS  [STANDOFF-ELECTRICAL-NOTHERMALS]  110.11,110.11 0 top
H33  STANDOFF_ELECTRICAL-NOTHERMALS  [STANDOFF-ELECTRICAL-NOTHERMALS]  14.86,143.13 0 top
H34  STANDOFF_ELECTRICAL-NOTHERMALS  [STANDOFF-ELECTRICAL-NOTHERMALS]  52.96,143.13 0 top
H35  STANDOFF_ELECTRICAL-NOTHERMALS  [STANDOFF-ELECTRICAL-NOTHERMALS]  33.91,162.18 0 top
H36  STANDOFF_ELECTRICAL-NOTHERMALS  [STANDOFF-ELECTRICAL-NOTHERMALS]  33.91,124.08 0 top
H37  STANDOFF_ELECTRICAL-NOTHERMALS  [STANDOFF-ELECTRICAL-NOTHERMALS]  12.32,121.54 0 top
H38  STANDOFF_ELECTRICAL-NOTHERMALS  [STANDOFF-ELECTRICAL-NOTHERMALS]  12.32,164.72 0 top
H39  STANDOFF_ELECTRICAL-NOTHERMALS  [STANDOFF-ELECTRICAL-NOTHERMALS]  55.5,121.54 0 top
H40  STANDOFF_ELECTRICAL-NOTHERMALS  [STANDOFF-ELECTRICAL-NOTHERMALS]  55.5,164.72 0 top
H41  STANDOFF_ELECTRICAL-NOTHERMALS  [STANDOFF-ELECTRICAL-NOTHERMALS]  69.47,143.13 0 top
H42  STANDOFF_ELECTRICAL-NOTHERMALS  [STANDOFF-ELECTRICAL-NOTHERMALS]  107.57,143.13 0 top
H43  STANDOFF_ELECTRICAL-NOTHERMALS  [STANDOFF-ELECTRICAL-NOTHERMALS]  88.52,162.18 0 top
H44  STANDOFF_ELECTRICAL-NOTHERMALS  [STANDOFF-ELECTRICAL-NOTHERMALS]  88.52,124.08 0 top
H45  STANDOFF_ELECTRICAL-NOTHERMALS  [STANDOFF-ELECTRICAL-NOTHERMALS]  66.93,121.54 0 top
H46  STANDOFF_ELECTRICAL-NOTHERMALS  [STANDOFF-ELECTRICAL-NOTHERMALS]  66.93,164.72 0 top
H47  STANDOFF_ELECTRICAL-NOTHERMALS  [STANDOFF-ELECTRICAL-NOTHERMALS]  110.11,121.54 0 top
H48  STANDOFF_ELECTRICAL-NOTHERMALS  [STANDOFF-ELECTRICAL-NOTHERMALS]  110.11,164.72 0 top
H49  STANDOFF_ELECTRICAL-NOTHERMALS  [STANDOFF-ELECTRICAL-NOTHERMALS]  14.86,197.74 0 top
H50  STANDOFF_ELECTRICAL-NOTHERMALS  [STANDOFF-ELECTRICAL-NOTHERMALS]  52.96,197.74 0 top
H51  STANDOFF_ELECTRICAL-NOTHERMALS  [STANDOFF-ELECTRICAL-NOTHERMALS]  33.91,216.79 0 top
H52  STANDOFF_ELECTRICAL-NOTHERMALS  [STANDOFF-ELECTRICAL-NOTHERMALS]  33.91,178.69 0 top
H53  STANDOFF_ELECTRICAL-NOTHERMALS  [STANDOFF-ELECTRICAL-NOTHERMALS]  12.32,176.15 0 top
H54  STANDOFF_ELECTRICAL-NOTHERMALS  [STANDOFF-ELECTRICAL-NOTHERMALS]  12.32,219.33 0 top
H55  STANDOFF_ELECTRICAL-NOTHERMALS  [STANDOFF-ELECTRICAL-NOTHERMALS]  55.5,176.15 0 top
H56  STANDOFF_ELECTRICAL-NOTHERMALS  [STANDOFF-ELECTRICAL-NOTHERMALS]  55.5,219.33 0 top
H57  STANDOFF_ELECTRICAL-NOTHERMALS  [STANDOFF-ELECTRICAL-NOTHERMALS]  69.47,197.74 0 top
H58  STANDOFF_ELECTRICAL-NOTHERMALS  [STANDOFF-ELECTRICAL-NOTHERMALS]  107.57,197.74 0 top
H59  STANDOFF_ELECTRICAL-NOTHERMALS  [STANDOFF-ELECTRICAL-NOTHERMALS]  88.52,216.79 0 top
H60  STANDOFF_ELECTRICAL-NOTHERMALS  [STANDOFF-ELECTRICAL-NOTHERMALS]  88.52,178.69 0 top
H61  STANDOFF_ELECTRICAL-NOTHERMALS  [STANDOFF-ELECTRICAL-NOTHERMALS]  66.93,176.15 0 top
H62  STANDOFF_ELECTRICAL-NOTHERMALS  [STANDOFF-ELECTRICAL-NOTHERMALS]  66.93,219.33 0 top
H63  STANDOFF_ELECTRICAL-NOTHERMALS  [STANDOFF-ELECTRICAL-NOTHERMALS]  110.11,176.15 0 top
H64  STANDOFF_ELECTRICAL-NOTHERMALS  [STANDOFF-ELECTRICAL-NOTHERMALS]  110.11,219.33 0 top
J1  SOLDER_PAD_2  [SOLDER_PAD_2]  58.47,37.78 261 bottom
J2  SOLDER_PAD_2  [SOLDER_PAD_2]  58.8,33.92 270 bottom
J3  SOLDER_PAD_2  [SOLDER_PAD_2]  58.5,29.85 99 bottom
J4  SOLDER_PAD_2  [SOLDER_PAD_2]  113.08,37.78 261 bottom
J5  SOLDER_PAD_2  [SOLDER_PAD_2]  113.41,33.92 270 bottom
J6  SOLDER_PAD_2  [SOLDER_PAD_2]  113.11,29.85 99 bottom
J7  SOLDER_PAD_2  [SOLDER_PAD_2]  58.47,92.39 261 bottom
J8  SOLDER_PAD_2  [SOLDER_PAD_2]  58.8,88.53 270 bottom
J9  SOLDER_PAD_2  [SOLDER_PAD_2]  58.5,84.45 99 bottom
J10  SOLDER_PAD_2  [SOLDER_PAD_2]  113.08,92.39 261 bottom
J11  SOLDER_PAD_2  [SOLDER_PAD_2]  113.41,88.53 270 bottom
J12  SOLDER_PAD_2  [SOLDER_PAD_2]  113.11,84.45 99 bottom
J13  SOLDER_PAD_2  [SOLDER_PAD_2]  58.47,147 261 bottom
J14  SOLDER_PAD_2  [SOLDER_PAD_2]  58.8,143.14 270 bottom
J15  SOLDER_PAD_2  [SOLDER_PAD_2]  58.5,139.06 99 bottom
J16  SOLDER_PAD_2  [SOLDER_PAD_2]  113.08,147 261 bottom
J17  SOLDER_PAD_2  [SOLDER_PAD_2]  113.41,143.14 270 bottom
J18  SOLDER_PAD_2  [SOLDER_PAD_2]  113.11,139.06 99 bottom
J19  SOLDER_PAD_2  [SOLDER_PAD_2]  58.47,201.61 261 bottom
J20  SOLDER_PAD_2  [SOLDER_PAD_2]  58.8,197.75 270 bottom
J21  SOLDER_PAD_2  [SOLDER_PAD_2]  58.5,193.67 99 bottom
J22  SOLDER_PAD_2  [SOLDER_PAD_2]  113.08,201.61 261 bottom
J23  SOLDER_PAD_2  [SOLDER_PAD_2]  113.41,197.75 270 bottom
J24  SOLDER_PAD_2  [SOLDER_PAD_2]  113.11,193.67 99 bottom
LOGO1  OSHW-LOGOS  [OSHW-LOGO-S]  9.14,33.92 270 bottom
LOGO2  SFE_LOGO_NAME.1_INCH  [SFE_LOGO_NAME_.1]  33.91,58.04 0 bottom
LOGO3  OSHW-LOGOS  [OSHW-LOGO-S]  63.75,33.92 270 bottom
LOGO4  SFE_LOGO_NAME.1_INCH  [SFE_LOGO_NAME_.1]  88.52,58.04 0 bottom
LOGO5  OSHW-LOGOS  [OSHW-LOGO-S]  9.14,88.53 270 bottom
LOGO6  SFE_LOGO_NAME.1_INCH  [SFE_LOGO_NAME_.1]  33.91,112.65 0 bottom
LOGO7  OSHW-LOGOS  [OSHW-LOGO-S]  63.75,88.53 270 bottom
LOGO8  SFE_LOGO_NAME.1_INCH  [SFE_LOGO_NAME_.1]  88.52,112.65 0 bottom
LOGO9  OSHW-LOGOS  [OSHW-LOGO-S]  9.14,143.14 270 bottom
LOGO10  SFE_LOGO_NAME.1_INCH  [SFE_LOGO_NAME_.1]  33.91,167.26 0 bottom
LOGO11  OSHW-LOGOS  [OSHW-LOGO-S]  63.75,143.14 270 bottom
LOGO12  SFE_LOGO_NAME.1_INCH  [SFE_LOGO_NAME_.1]  88.52,167.26 0 bottom
LOGO13  OSHW-LOGOS  [OSHW-LOGO-S]  9.14,197.75 270 bottom
LOGO14  SFE_LOGO_NAME.1_INCH  [SFE_LOGO_NAME_.1]  33.91,221.87 0 bottom
LOGO15  OSHW-LOGOS  [OSHW-LOGO-S]  63.75,197.75 270 bottom
LOGO16  SFE_LOGO_NAME.1_INCH  [SFE_LOGO_NAME_.1]  88.52,221.87 0 bottom
U$1  [LUMINI_2#0]  29.78,9.37 180 bottom
U$2  [54]  52.46,50.38 45 bottom
U$3  [156]  17.48,52.5 315 bottom
U$4  [5V6]  56.64,37.91 262 bottom
U$5  [G4]  56.32,39.62 262 bottom
U$6  [194]  9.66,39.33 279 bottom
U$7  [DO3]  56.77,30.73 279 bottom
U$8  [CO1]  57.09,32.7 279 bottom
U$9  [CI6]  56.98,34.2 270 bottom
U$10  [DI4]  56.96,36.2 270 bottom
U$11  [40_APA102_LED#S1]  27.24,10.77 180 bottom
U$12  [258]  15.16,17.64 225 bottom
U$13  [3510]  50.22,15.21 135 bottom
U$14  [LUMINI_2#0]  84.39,9.37 180 bottom
U$15  [5V6]  111.25,37.91 262 bottom
U$16  [G4]  110.93,39.62 262 bottom
U$17  [DO3]  111.38,30.73 279 bottom
U$18  [CO1]  111.7,32.7 279 bottom
U$19  [CI6]  111.59,34.2 270 bottom
U$20  [DI4]  111.57,36.2 270 bottom
U$21  [40_APA102_LED#S1]  81.85,10.77 180 bottom
U$22  [54]  107.07,50.38 45 bottom
U$23  [156]  72.09,52.5 315 bottom
U$24  [194]  64.27,39.33 279 bottom
U$25  [258]  69.77,17.64 225 bottom
U$26  [3510]  104.83,15.21 135 bottom
U$27  [LUMINI_2#0]  29.78,63.98 180 bottom
U$28  [5V6]  56.64,92.52 262 bottom
U$29  [G4]  56.32,94.23 262 bottom
U$30  [DO3]  56.77,85.34 279 bottom
U$31  [CO1]  57.09,87.31 279 bottom
U$32  [CI6]  56.98,88.81 270 bottom
U$33  [DI4]  56.96,90.8 270 bottom
U$34  [40_APA102_LED#S1]  27.24,65.38 180 bottom
U$35  [54]  52.46,104.99 45 bottom
U$36  [156]  17.48,107.11 315 bottom
U$37  [194]  9.66,93.94 279 bottom
U$38  [258]  15.16,72.25 225 bottom
U$39  [3510]  50.22,69.82 135 bottom
U$40  [LUMINI_2#0]  84.39,63.98 180 bottom
U$41  [5V6]  111.25,92.52 262 bottom
U$42  [G4]  110.93,94.23 262 bottom
U$43  [DO3]  111.38,85.34 279 bottom
U$44  [CO1]  111.7,87.31 279 bottom
U$45  [CI6]  111.59,88.81 270 bottom
U$46  [DI4]  111.57,90.8 270 bottom
U$47  [40_APA102_LED#S1]  81.85,65.38 180 bottom
U$48  [54]  107.07,104.99 45 bottom
U$49  [156]  72.09,107.11 315 bottom
U$50  [194]  64.27,93.94 279 bottom
U$51  [258]  69.77,72.25 225 bottom
U$52  [3510]  104.83,69.82 135 bottom
U$53  [LUMINI_2#0]  29.78,118.59 180 bottom
U$54  [5V6]  56.64,147.13 262 bottom
U$55  [G4]  56.32,148.84 262 bottom
U$56  [DO3]  56.77,139.95 279 bottom
U$57  [CO1]  57.09,141.92 279 bottom
U$58  [CI6]  56.98,143.42 270 bottom
U$59  [DI4]  56.96,145.41 270 bottom
U$60  [40_APA102_LED#S1]  27.24,119.99 180 bottom
U$61  [54]  52.46,159.6 45 bottom
U$62  [156]  17.48,161.72 315 bottom
U$63  [194]  9.66,148.55 279 bottom
U$64  [258]  15.16,126.86 225 bottom
U$65  [3510]  50.22,124.43 135 bottom
U$66  [LUMINI_2#0]  84.39,118.59 180 bottom
U$67  [5V6]  111.25,147.13 262 bottom
U$68  [G4]  110.93,148.84 262 bottom
U$69  [DO3]  111.38,139.95 279 bottom
U$70  [CO1]  111.7,141.92 279 bottom
U$71  [CI6]  111.59,143.42 270 bottom
U$72  [DI4]  111.57,145.41 270 bottom
U$73  [40_APA102_LED#S1]  81.85,119.99 180 bottom
U$74  [54]  107.07,159.6 45 bottom
U$75  [156]  72.09,161.72 315 bottom
U$76  [194]  64.27,148.55 279 bottom
U$77  [258]  69.77,126.86 225 bottom
U$78  [3510]  104.83,124.43 135 bottom
U$79  [LUMINI_2#0]  29.78,173.2 180 bottom
U$80  [5V6]  56.64,201.74 262 bottom
U$81  [G4]  56.32,203.45 262 bottom
U$82  [DO3]  56.77,194.56 279 bottom
U$83  [CO1]  57.09,196.53 279 bottom
U$84  [CI6]  56.98,198.03 270 bottom
U$85  [DI4]  56.96,200.03 270 bottom
U$86  [40_APA102_LED#S1]  27.24,174.6 180 bottom
U$87  [54]  52.46,214.21 45 bottom
U$88  [156]  17.48,216.33 315 bottom
U$89  [194]  9.66,203.16 279 bottom
U$90  [258]  15.16,181.47 225 bottom
U$91  [3510]  50.22,179.04 135 bottom
U$92  [LUMINI_2#0]  84.39,173.2 180 bottom
U$93  [5V6]  111.25,201.74 262 bottom
U$94  [G4]  110.93,203.45 262 bottom
U$95  [DO3]  111.38,194.56 279 bottom
U$96  [CO1]  111.7,196.53 279 bottom
U$97  [CI6]  111.59,198.03 270 bottom
U$98  [DI4]  111.57,200.03 270 bottom
U$99  [40_APA102_LED#S1]  81.85,174.6 180 bottom
U$100  [54]  107.07,214.21 45 bottom
U$101  [156]  72.09,216.33 315 bottom
U$102  [194]  64.27,203.16 279 bottom
U$103  [258]  69.77,181.47 225 bottom
U$104  [3510]  104.83,179.04 135 bottom

## Library data of the parts
C1-C8 = SparkFun-Capacitors; PROD_ID: CAP-10300
D1-D320 = SparkFun-LED; PROD_ID: DIO-13883
E$1 = SparkFun-Retired
E$5 E$6 FD1-FD32 LOGO1-LOGO16 = SparkFun-Aesthetics
H1-H64 = SparkFun-Hardware
J1-J24 = SparkFun-Connectors
U$1 U$14 U$27 U$40 U$53 U$66 U$79 U$92 = buzzard_labels (8)
U$2 U$3 U$12 U$13 U$22 U$23 U$25 U$26 U$35 U$36 U$38 U$39 U$48 U$49 U$51 U$52 U$61 U$62 U$64 U$65 U$74 U$75 U$77 U$78 U$87 U$88 U$90 U$91 U$100 U$101 U$103 U$104 = buzzard_labels (5)
U$4 U$5 U$7 U$8 U$15-U$18 U$28-U$31 U$41-U$44 U$54-U$57 U$67-U$70 U$80-U$83 U$93-U$96 = buzzard_labels (25)
U$6 U$24 U$37 U$50 U$63 U$76 U$89 U$102 = buzzard_labels (6)
U$9 U$10 U$19 U$20 U$32 U$33 U$45 U$46 U$58 U$59 U$71 U$72 U$84 U$85 U$97 U$98 = buzzard_labels (26)
U$11 U$21 U$34 U$47 U$60 U$73 U$86 U$99 = buzzard_labels (28)